# Altium PCB PCB2.pcbdoc
Units mm, origin at the board's own origin, x right, y up, seen from the top; angles counter-clockwise.
Board outline 22.76 x 19.16 mm, 2 copper layers (Top Layer, Bottom Layer); 1 components, 0 nets, 3 pads, 0 vias.
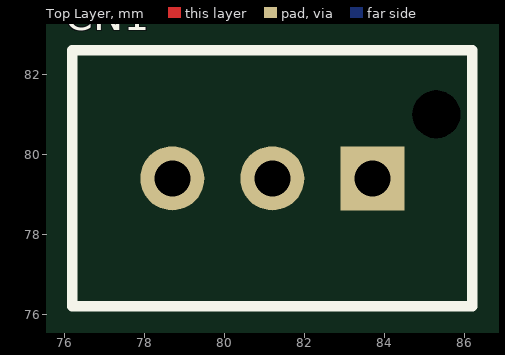
[diagram p0: Top Layer view]
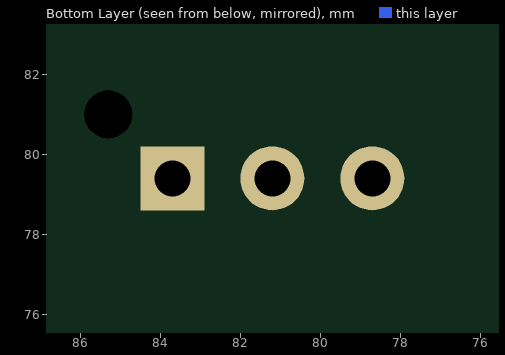
[diagram p1: Bottom Layer view, seen from below]

## Layer stack, top to bottom
Top Layer: signal copper (thickness not stored)
Dielectric: dielectric 0.32, FR-4, Dk 4.8
Bottom Layer: signal copper (thickness not stored)

## Board outline
92.61,69.85 69.85,69.85 69.85,89.01 92.61,89.01

## Components (designator, comment, footprint, x,y, rotation, side; value= is the part's Value field where it differs from the comment)
CN1 "B03B-XASK-1-A(LF)(SN)" CONN-TH_B03B-XASK-1-A-LF-SN 81.2,79.4 r0 top

## Footprints (in the part's own frame and the unit in brackets; to place one, negate y for a bottom-side part, rotate by r counter-clockwise, add the part's x,y. Pads: shape width x height; smd on the part's side, far side on the other; paste and mask are expansions set on the pad)
CONN-TH_B03B-XASK-1-A-LF-SN [mm]
  rect 1.6x1.6 hole 0.9 paste+0 mask+0.051: 1(2.5,0)
  round 1.6 hole 0.9 paste+0 mask+0.051: 2(0,0) 3(-2.5,0)
  Multi-Layer board cut-out: 4.7,1.6 4.641,1.86 4.474,2.069 4.234,2.185 3.967,2.185 3.726,2.069 3.56,1.86 3.5,1.6 3.5,1.6 3.56,1.34 3.726,1.131 3.967,1.015 4.234,1.015 4.474,1.131 4.641,1.34 4.7,1.6
  silkscreen extent -5,-3.2 5,3.2

## Nets (pads, with @x,y where several pads share a name; then routed paths per layer and width w, separated by ;. In a path a pad name is that pad's centre, name@x,y a point inside that pad or via, vN(x,y) a via of type N, cw(c..) or ccw(c..) an arc to the next point about the centre after c; other vN are vias at no path point)
pads on no net: CN1.1 CN1.2 CN1.3